# Altium PCB PCB.PcbDoc
Units mil, origin at the board's own origin, x right, y up, seen from the top; angles counter-clockwise.
Board outline 6000 x 4000 mil, 2 copper layers (Top Layer, Bottom Layer); 74 components, 61 nets, 247 pads, 0 vias.
Unrouted connection lines stored in the file: 169.
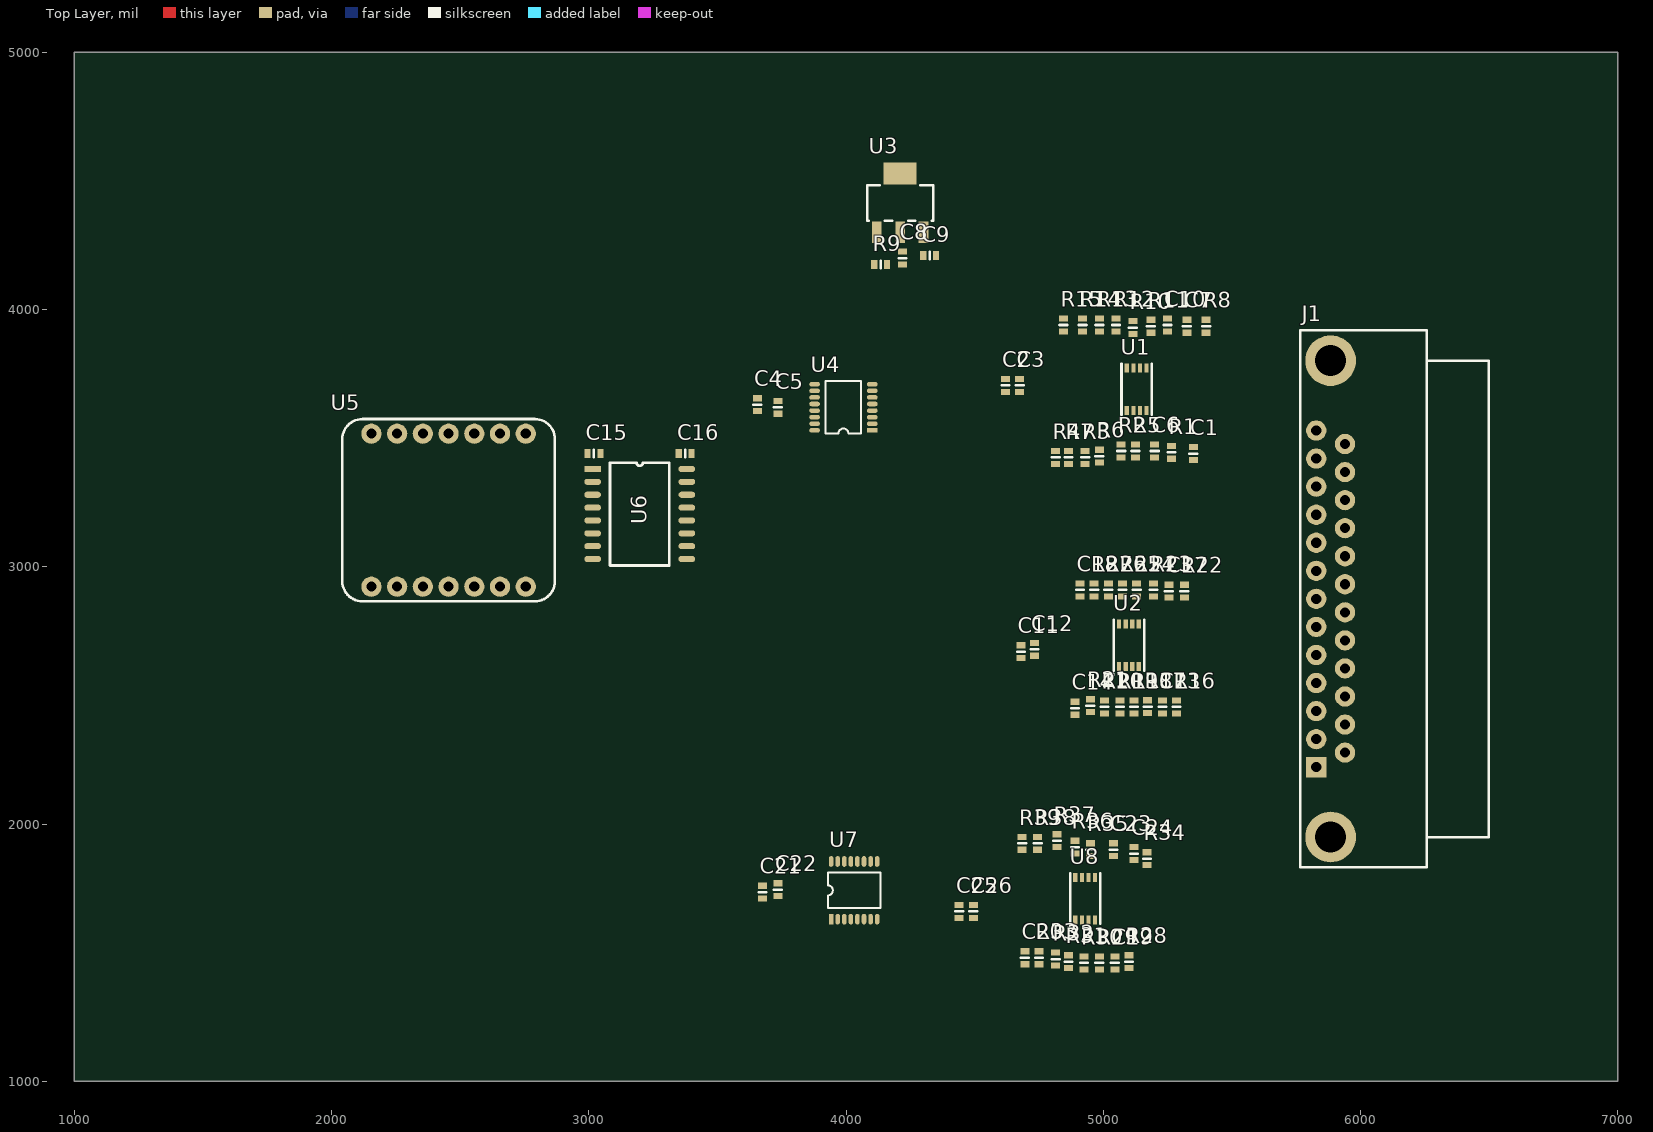
[diagram p0: Top Layer view]
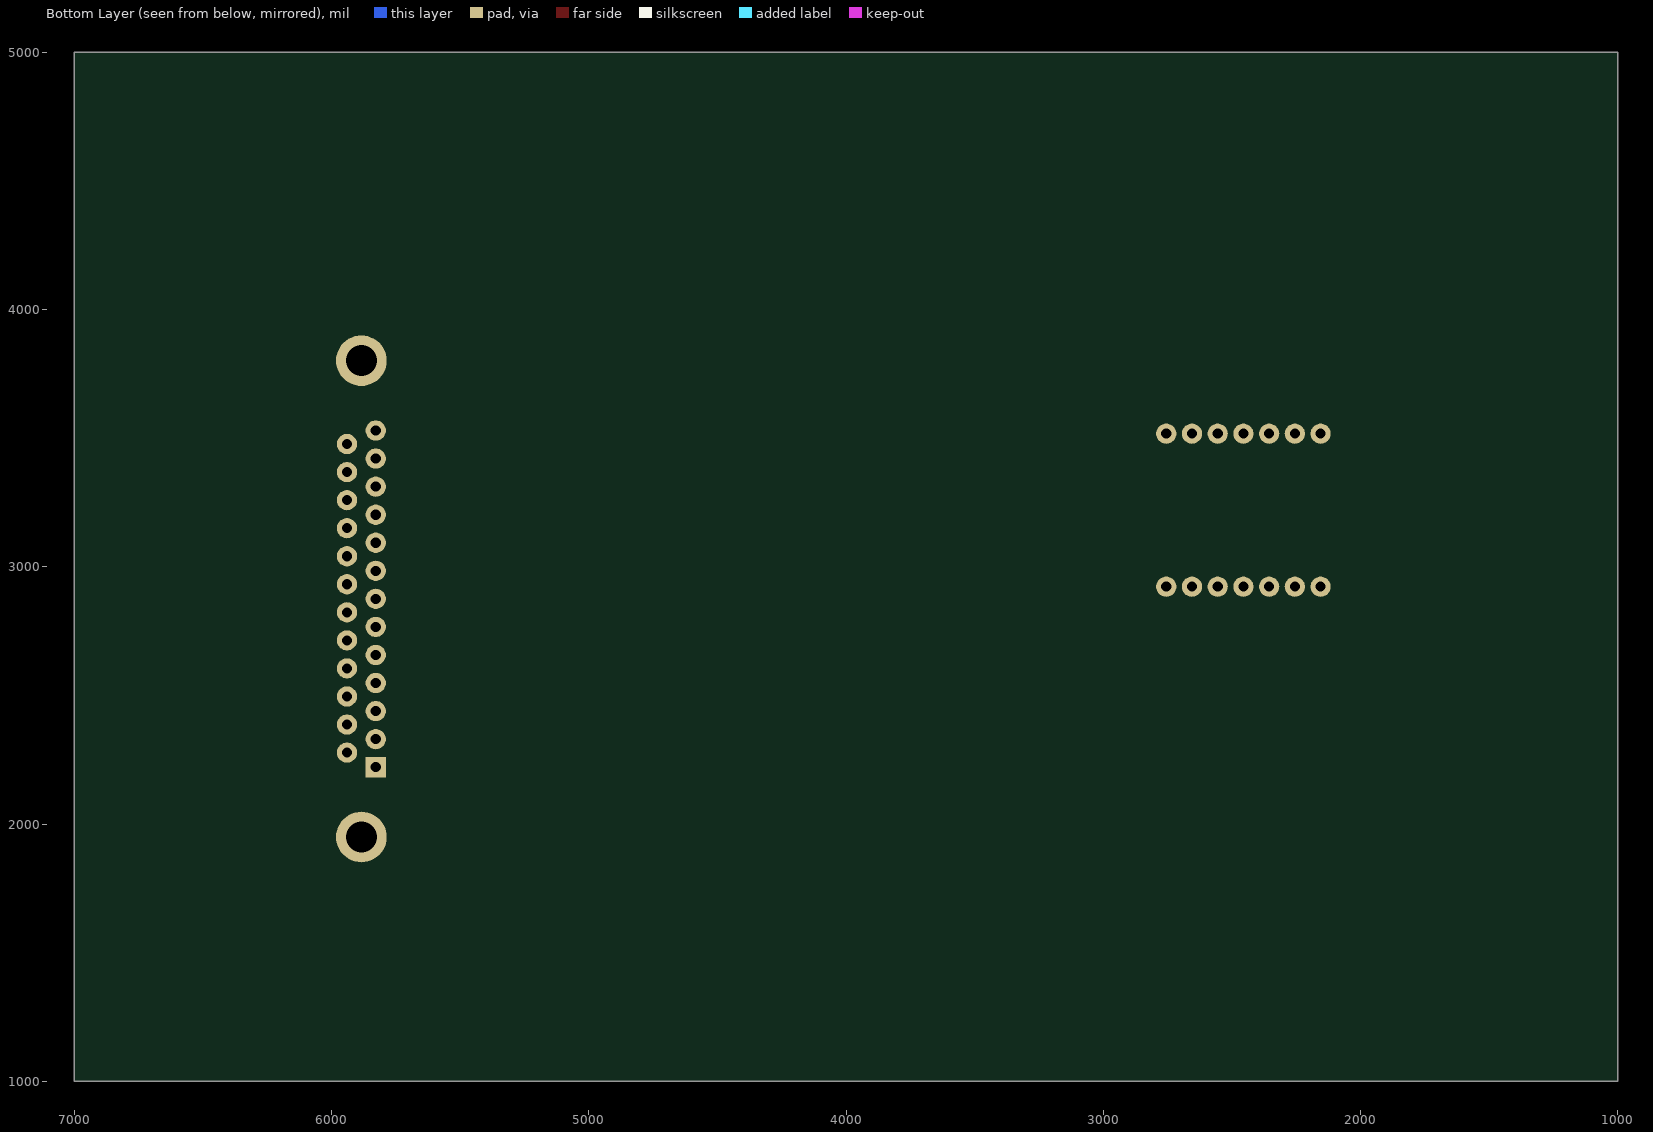
[diagram p1: Bottom Layer view, seen from below]

## Layer stack, top to bottom
Top Solder: solder mask 0.4, Solder Resist, Dk 3.5
Top Layer: signal copper 1.4
Dielectric 1: dielectric 12.6, FR-4, Dk 4.8
Bottom Layer: signal copper 1.4
Bottom Solder: solder mask 0.4, Solder Resist, Dk 3.5

## Board outline
1000,1000 7000,1000 7000,5000 1000,5000

## Design rules (kind name [scope] priority, off if disabled: settings)
Clearance [All] p1: gap=10 ignorepadtopadclearanceinfootprint=FALSE except(0: Arc-Hole Track-Hole SMDPad-Hole THPad-Hole Via-Hole Fill-Hole Poly-Hole Region-Hole Text-Hole)
PolygonConnect [All] p1: connectstyle=Relief reliefconductorwidth=10 reliefentries=4 polygonreliefangle="90 Angle" airgapwidth=10
RoutingVias [All] p1: holewidth=28 width=50 viastyle="Through Hole" minholewidth=28 minwidth=50 maxholewidth=28 maxwidth=50
SolderMaskExpansion [All] p1: expansion=4 istentingtop=FALSE
Width [All] p1: maxlimit=10 minlimit=10 preferedwidth=10
30 further rules are at their usual default settings.

## Components (designator, comment, footprint, x,y, rotation, side; value= is the part's Value field where it differs from the comment)
C1 "27nF" "0603 B" 5350,3440 r90 top
C2 "100nF" "0603 B" 4620,3705 r90 top
C3 "100nF" "0603 B" 4675,3705 r90 top
C4 "10uF" "0603 B" 3655,3630 r90 top
C5 "100nF" "0603 B" 3735,3620 r90 top
C6 "1.5nF" "0603 B" 5200,3450 r90 top
C7 "27nF" "0603 B" 5325,3935 r90 top
C8 "10uF" "0603 B" 4220,4200 r90 top
C9 "10uF" "0603 B" 4325,4210 r180 top
C10 "1.5nF" "0603 B" 5250,3940 r90 top
C11 "100nF" "0603 B" 4680,2670 r90 top
C12 "100nF" "0603 B" 4732.42,2678.93 r90 top
C13 "15nF" "0603 B" 5230,2455 r90 top
C14 "15nF" "0603 B" 4890,2450 r90 top
C15 "100nF" "0603 B" 3020,3440 r180 top
C16 "100nF" "0603 B" 3375,3440 r0 top
C17 "15nF" "0603 B" 5255,2905 r90 top
C18 "15nF" "0603 B" 4910,2910 r90 top
C19 "15nF" "0603 B" 5045,1460 r90 top
C20 "15nF" "0603 B" 4695,1480 r90 top
C21 "10uF" "0603 B" 3675,1735 r90 top
C22 "100nF" "0603 B" 3735,1745 r90 top
C23 "15nF" "0603 B" 5040,1900 r90 top
C24 "15nF" "0603 B" 5120,1885 r90 top
C25 "100nF" "0603 B" 4440,1660 r90 top
C26 "100nF" "0603 B" 4495,1660 r270 top
J1 "MNSO-31-VV-N-ETH-M" DB25-PL 5828.19,2875.2 r270 top
R1 "80k" 0603 5265,3445 r90 top
R2 "10k" 0603 5070,3450 r90 top
R3 "80k" 0603 4930,3425 r90 top
R4 "10k" 0603 4815,3425 r90 top
R5 "10k" 0603 5125,3450 r90 top
R6 "10R" 0603 4985,3430 r90 top
R7 "10R" 0603 4865,3425 r90 top
R8 "80k" 0603 5400,3935 r90 top
R9 "10R" 0603 4135,4175 r180 top
R10 "10k" 0603 5115,3930 r90 top
R11 "10k" 0603 5185,3935 r90 top
R12 "10R" 0603 5050,3940 r90 top
R13 "80k" 0603 4985,3940 r90 top
R14 "10R" 0603 4920,3940 r90 top
R15 "10k" 0603 4845,3940 r90 top
R16 "10k" 0603 5285,2455 r90 top
R17 "80k" 0603 5172.73,2456.02 r90 top
R18 "80k" 0603 5120,2455 r90 top
R19 "10k" 0603 5065,2455 r90 top
R20 "10k" 0603 5005,2455 r90 top
R21 "40k" 0603 4950,2460 r90 top
R22 "10k" 0603 5315,2905 r90 top
R23 "80k" 0603 5195,2910 r90 top
R24 "80k" 0603 5130,2910 r90 top
R25 "10k" 0603 5075,2910 r90 top
R26 "10k" 0603 5020,2910 r90 top
R27 "40k" 0603 4965,2910 r90 top
R28 "10k" 0603 5100,1465 r270 top
R29 "80k" 0603 4985,1460 r90 top
R30 "80k" 0603 4925,1460 r90 top
R31 "10k" 0603 4865,1465 r90 top
R32 "10k" 0603 4815,1475 r90 top
R33 "40k" 0603 4750,1480 r90 top
R34 "10k" 0603 5170,1865 r90 top
R35 "80k" 0603 4950,1900 r90 top
R36 "80k" 0603 4890,1910 r90 top
R37 "10k" 0603 4820,1935 r90 top
R38 "10k" 0603 4745,1925 r90 top
R39 "40k" 0603 4685,1925 r90 top
U1 "LTC6253" MS8 5130,3690 r90 top
U2 "LTC6253" MS8 5100,2695 r90 top
U3 "LM1117IMP-3.3" SOT-223 4210.55,4414.17 r0 top
U4 "AD5686R" TSSOP16 3990,3620 r180 top
U5 "SEEED XIAO" "Seeed XIAO" 2455,3220 r90 top
U6 "ISO6761-Q1" SO-16 3015,3380 r0 top
U7 "AD5592RBRUZ" TSSOP16 4031.61,1742.2 r90 top
U8 "LTC6253" MS8 4930,1710 r90 top

## Footprints (in the part's own frame and the unit in brackets; to place one, negate y for a bottom-side part, rotate by r counter-clockwise, add the part's x,y. Pads: shape width x height; smd on the part's side, far side on the other; paste and mask are expansions set on the pad)
0603 [mil] "SMD 0603"
  rect 24x35 smd: 1(-25,0) 2(25,0)
  silkscreen extent 0,-15 0,15, body extent -31,-16 31,16, height 18
"0603 B" [mil] "SMD 0603 blue"
  rect 24x35 smd: 1(-25,0) 2(25,0)
  silkscreen extent 0,-15 0,15, body extent -31,-16 31,16, height 18
DB25-PL [mm]
  rect 2x2 hole 1: 1(16.62,0)
  round 2 hole 1: 2(13.85,0) 3(11.08,0) 4(8.31,0) 5(5.54,0) 6(2.77,0) 7(0,0) 8(-2.77,0) 9(-5.54,0) 10(-8.31,0) 11(-11.08,0) 12(-13.85,0) 13(-16.62,0) 14(15.18,2.84) 15(12.41,2.84) 16(9.64,2.84) 17(6.87,2.84) 18(4.1,2.84) 19(1.33,2.84) 20(-1.44,2.84) 21(-4.21,2.84) 22(-6.98,2.84) 23(-9.75,2.84) 24(-12.52,2.84) 25(-15.29,2.84)
  round 5 hole 3.05: CASE(-23.52,1.42) CASE(23.52,1.42)
  silkscreen extent -26.52,-1.58 26.52,17.02
MS8 [mm] "Linear Technologies MSOP 8"
  rect 0.9x0.42 smd: 1(-2.1,0.975) 2(-2.1,0.325) 3(-2.1,-0.325) 4(-2.1,-0.975) 5(2.1,-0.975) 6(2.1,-0.325) 7(2.1,0.325) 8(2.1,0.975)
  silkscreen extent -3.04,-1.5 2.5,1.74
"Seeed XIAO" [mm] "Rasberry Pi Zero"
  round 2 hole 1: 0(-7.555,7.62) 1(-7.555,5.08) 2(-7.555,2.54) 3(-7.555,0) 4(-7.555,-2.54) 5(-7.555,-5.08) 6(-7.555,-7.62) 7(7.555,-7.62) 8(7.555,-5.08) 9(7.555,-2.54) 10(7.555,0) 11(7.555,2.54) 12(7.555,5.08) 13(7.555,7.62)
  silkscreen extent -9,-10.5 9,10.5, body extent -8.9,-10.6 8.9,11.9, height 6.83
SO-16 [mm]
  rect 1.65x0.6 smd: 1(0,0)
  oval 1.65x0.6 smd: 2(0,-1.27) 3(0,-2.54) 4(0,-3.81) 5(0,-5.08) 6(0,-6.35) 7(0,-7.62) 8(0,-8.89) 9(9.3,-8.89) 10(9.3,-7.62) 11(9.3,-6.35) 12(9.3,-5.08) 13(9.3,-3.81) 14(9.3,-2.54) 15(9.3,-1.27) 16(9.3,0)
  silkscreen extent 1.71,-9.53 7.59,0.64
SOT-223 [mm] "SOT-123"
  rect 0.95x2.15 smd: 1(-2.3,-2.9) 2(0,-2.9) 3(2.3,-2.9)
  rect 3.25x2.15 smd: 4(0,2.9)
  silkscreen extent -3.25,-1.75 3.25,1.75, body extent -3.25,-3.5 3.25,3.5, height 1.64
TSSOP16 [mm]
  rect 1.05x0.45 smd: 1(-2.85,2.275)
  oval 1.05x0.45 smd: 2(-2.85,1.625) 3(-2.85,0.975) 4(-2.85,0.325) 5(-2.85,-0.325) 6(-2.85,-0.975) 7(-2.85,-1.625) 8(-2.85,-2.275) 9(2.85,-2.275) 10(2.85,-1.625) 11(2.85,-0.975) 12(2.85,-0.325) 13(2.85,0.325) 14(2.85,0.975) 15(2.85,1.625) 16(2.85,2.275)
  silkscreen extent -1.75,-2.6 1.75,2.6, body extent -3.14,-2.5 3.14,2.5, height 1.09

## Part data
C1 C2 C3 C4 C5 C6 C7 C8 C9 C10 C11 C12 C13 C14 C15 C16 C17 C18 C19 C20 C21 C22 C23 C24 C25 C26: library part "CAP 0603", "603 Capacitor"
J1: library part DSUB25-PL, "31 Contacts Surface Mount Vertical Female Nano-D", COTS ref=A29200-031, Ref=MNSO-31-VV-N-ETH-M
R1 R2 R3 R4 R5 R6 R7 R8 R9 R10 R11 R12 R13 R14 R15 R16 R17 R18 R19 R20 R21 R22 R23 R24 R25 R26 R27 R28 R29 R30 R31 R32 R33 R34 R35 R36 R37 R38 R39: library part "RES 0603", "603 Resistor"
U1 U2 U8: library part LT6011, "Dual 35μA, 14nV/√Hz, Rail-to-Rail Output Precision Op Amp", Ref=LTC6253
U3: library part LM1117-3.3, "800-mA Low-Dropout Linear Regulator", Ref=LM1117IMP-3.3
U4: "Quad, 16-Bit DAC with 2 ppm/°C Reference, SPI Interface", Ref=AD5686R
U5: library part "XIAO nRF52840", "nRF52840", Ref="SEEED XIAO"
U6: "General-Purpose Six-Channel Automotive Reinforced Digital Isolators with Robust EMC", Ref=ISO6761-Q1
U7: "8-Channel, 12-Bit, Configurable ADC/DAC with On-Chip Reference, SPI Interface, TSSOP", Ref=AD5592RBRUZ

## Nets (pads, with @x,y where several pads share a name; then routed paths per layer and width w, separated by ;. In a path a pad name is that pad's centre, name@x,y a point inside that pad or via, vN(x,y) a via of type N, cw(c..) or ccw(c..) an arc to the next point about the centre after c; other vN are vias at no path point)
3V3C: C15.2 U5.11 U6.1
3V3LP: C4.2 C5.2 C8.2 C16.2 C21.2 C22.2 U3.2 U3.4 U4.5 U4.11 U4.16 U6.16 U7.3
5V: C9.2 J1.15 U3.3
5VC: U5.13
15V: C2.2 C11.2 C25.2 J1.19 U1.8 U2.8 U8.8
DAC_X: R10.2 U4.6
DAC_Y: R2.2 U4.3
GND: C1.2 C2.1 C3.2 C4.1 C5.1 C7.2 C9.1 C11.1 C12.2 C14.1 C16.1 C18.1 C20.1 C21.1 C22.1 C24.1 C25.1 C26.2 J1.2 J1.6 J1.16 J1.20 J1.22 J1.CASE R4.2 R7.2 R9.2 R14.2 R15.2 R17.1 R21.1 R23.1 R27.1 R29.1 R33.1 R35.1 R39.1 U3.1 U4.4 U4.9 U4.10 U6.9 U7.14
GNDC: C15.1 U5.12 U6.8
N15V: C3.1 C12.1 C26.1 J1.7 U1.4 U2.4 U8.4
NetC1_1: C1.1 R1.1 R2.1 R5.2
NetC6_1: C6.1 R5.1 U1.2
NetC6_2: C6.2 R1.2 R6.2 U1.1
NetC7_1: C7.1 R8.1 R10.1 R11.2
NetC8_1: C8.1 R9.1
NetC10_1: C10.1 R11.1 U1.6
NetC10_2: C10.2 R8.2 R12.2 U1.7
NetC13_1: C13.1 R16.2 R19.2 U2.1
NetC13_2: C13.2 R16.1 R17.2 R18.2 U2.2
NetC17_1: C17.1 R22.2 R25.2 U2.7
NetC17_2: C17.2 R22.1 R23.2 R24.2 U2.6
NetC18_2: C18.2 R25.1 U7.5
NetC19_1: C19.1 R28.2 R31.2 U8.1
NetC19_2: C19.2 R28.1 R29.2 R30.2 U8.2
NetC20_2: C20.2 R31.1 U7.6
NetC23_1: C23.1 R34.2 R37.2 U8.7
NetC23_2: C23.2 R34.1 R35.2 R36.2 U8.6
NetC24_2: C24.2 R37.1 U7.7
NetR3_1: R3.1 R4.1 U1.3
NetR13_1: R13.1 R15.1 U1.5
NetR19_1: R19.1 U7.4
NetR20_2: R20.2 R21.2 U2.3
NetR26_2: R26.2 R27.2 U2.5
NetR32_2: R32.2 R33.2 U8.3
NetR38_2: R38.2 R39.2 U8.5
SPI_CS0: U4.13 U6.13
SPI_CS1: U6.12 U7.2
SPI_PICO: U4.14 U6.14 U7.15
SPI_POCI: U4.8 U6.10 U7.9
SPI_R\S\T\: U4.15 U6.11 U7.1
SPI_SCK: U4.12 U6.15 U7.16
SPIC_CS0: U5.3 U6.4
SPIC_CS1: U5.4 U6.5
SPIC_PICO: U5.10 U6.3
SPIC_POCI: U5.9 U6.7
SPIC_R\S\T\: U5.2 U6.6
SPIC_SCK: U5.8 U6.2
Vref_DX: R13.2 U4.7
Vref_DY: R3.2 U4.2
Vref_XE: R32.1 U7.12
Vref_XP: R20.1 U7.10
Vref_YE: R38.1 U7.13
Vref_YP: R26.1 U7.11
"X ERROR": J1.1 R30.1
"X POSITION": J1.14 R18.1
"X+ COMMAND": J1.4 R6.1
"X-  COMMAND": J1.3 R7.1
"Y ERROR": J1.24 R36.1
"Y POSITION": J1.23 R24.1
"Y+  COMMAND": J1.13 R12.1
"Y-  COMMAND": J1.12 R14.1
pads on no net: C14.2 J1.5 J1.8 J1.9 J1.10 J1.11 J1.17 J1.18 J1.21 J1.25 U4.1 U5.0 U5.1 U5.5 U5.6 U5.7 U7.8